# Altium PCB PCB.PcbDoc
Units mm, origin at the board's own origin, x right, y up, seen from the top; angles counter-clockwise.
Board outline 49.04 x 15.89 mm, 2 copper layers (Top Layer, Bottom Layer); 22 components, 11 nets, 52 pads, 10 vias.
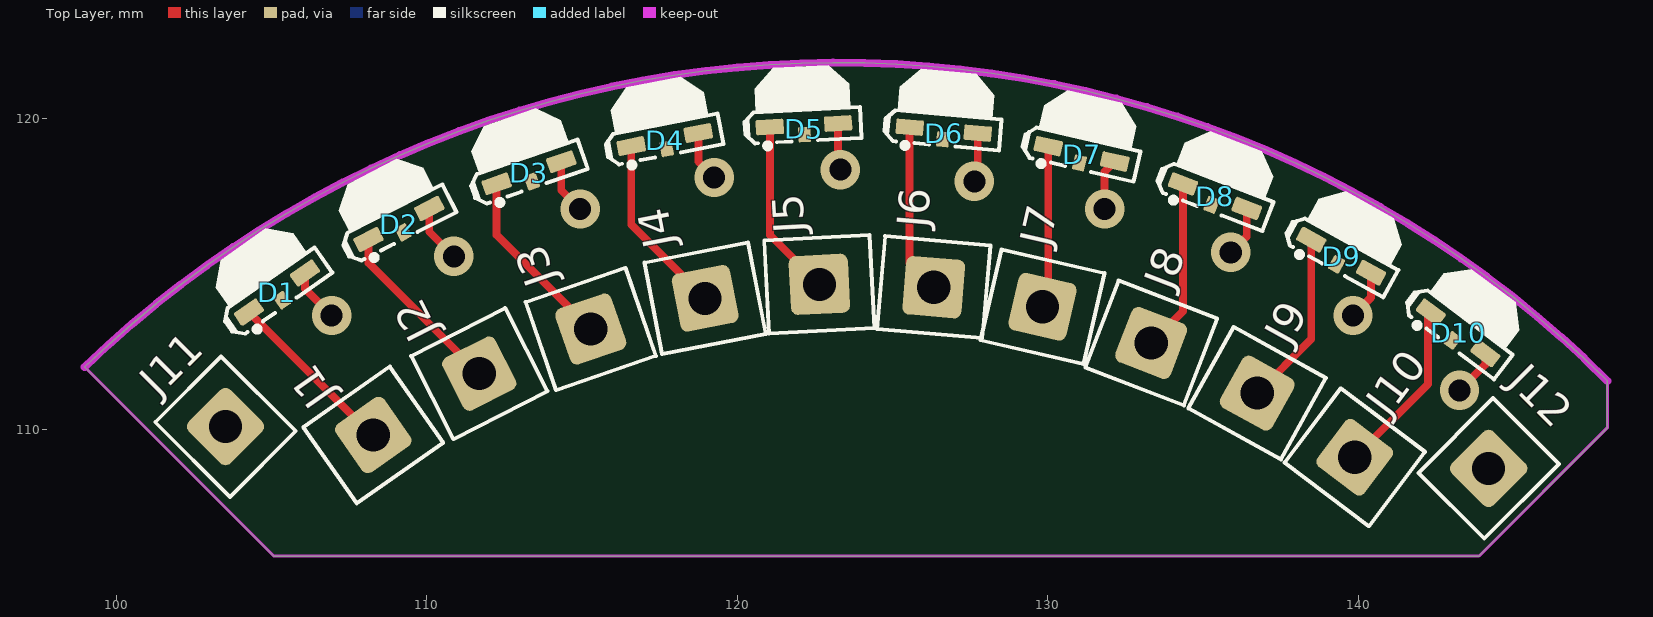
[diagram p0: Top Layer view]
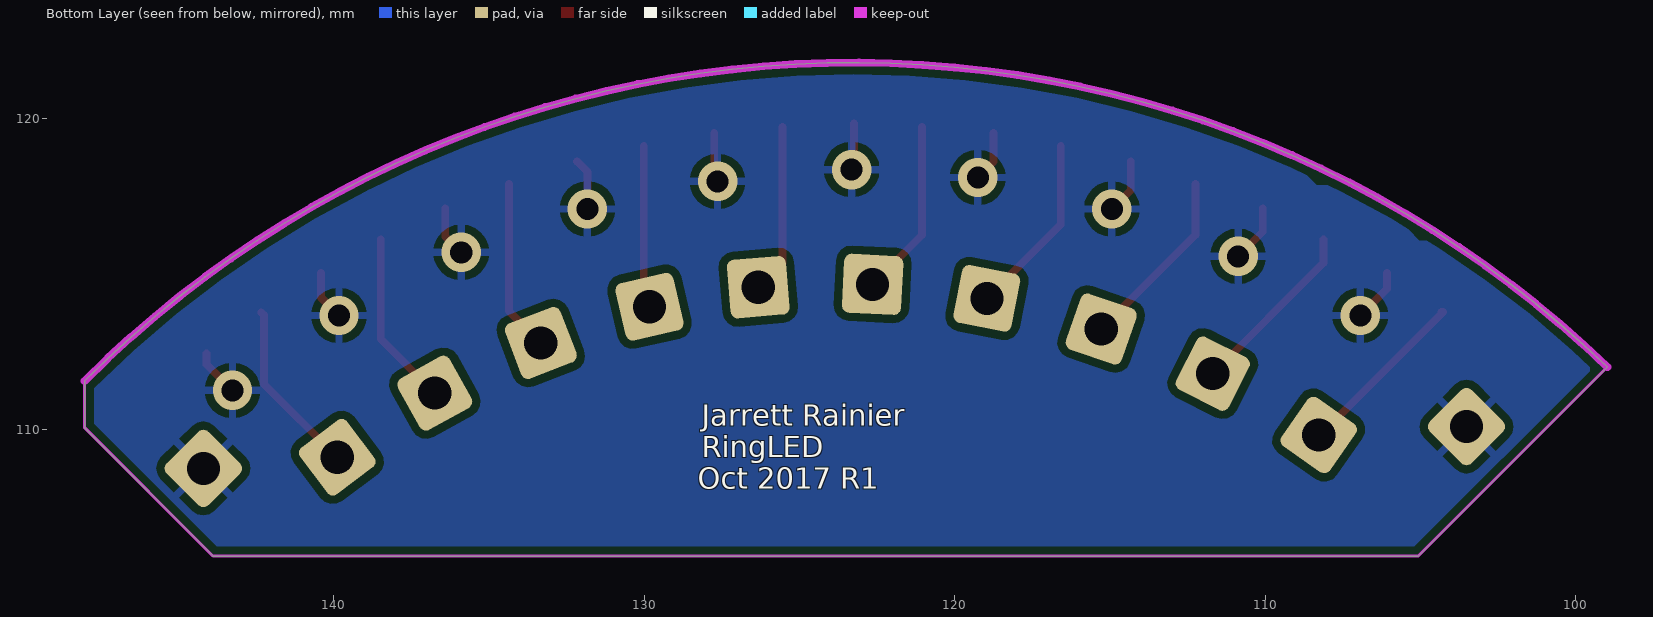
[diagram p1: Bottom Layer view, seen from below]
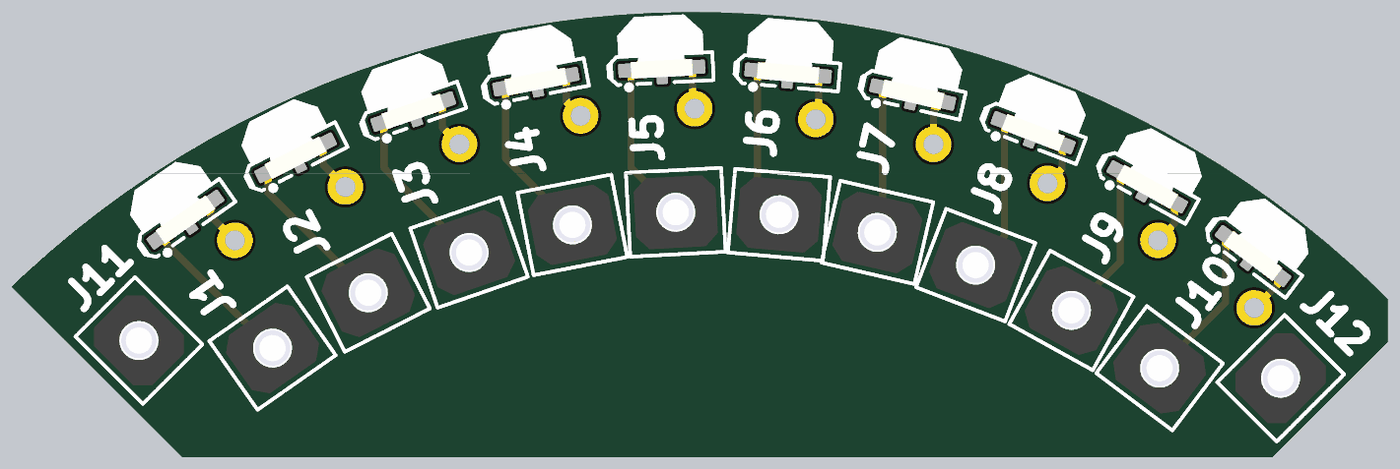
[diagram p2: 3D render of the assembled board from above, using the file's embedded part models]

## Layer stack, top to bottom
Top Layer: signal copper 0.0356
Dielectric: dielectric 0.32, FR-4, Dk 4.8
Bottom Layer: signal copper 0.0356

## Board outline
105.063,105.918 98.977,112.005 cw(c123.271,86.81) 148.02,111.558 148.02,110.049 143.888,105.918

## Design rules (kind name [scope] priority, off if disabled: settings)
Clearance [All] p1: gap=0.254
PolygonConnect [All] p1: connectstyle=Relief reliefconductorwidth=0.254 reliefentries=4 polygonreliefangle="90 Angle"
RoutingVias [All] p1: holewidth=0.711 width=1.27 viastyle="Through Hole" minholewidth=0.711 minwidth=1.27 maxholewidth=0.711 maxwidth=1.27
SilkscreenOverComponentPads [All] p1: minsilkscreentomaskgap=0.254
SolderMaskExpansion [All] p1: expansion=0.102
Width [All] p1: maxlimit=0.254 minlimit=0.254 preferedwidth=0.254
27 further rules are at their usual default settings.

## Components (designator, comment, footprint, x,y, rotation, side; value= is the part's Value field where it differs from the comment)
D1 "Blue" LED-0805S-SIDELED-2.1X0.6X1.0 105.172,114.404 r35 top
D2 "Blue" LED-0805S-SIDELED-2.1X0.6X1.0 109.098,116.611 r27 top
D3 "Blue" LED-0805S-SIDELED-2.1X0.6X1.0 113.288,118.263 r19 top
D4 "Blue" LED-0805S-SIDELED-2.1X0.6X1.0 117.663,119.329 r11 top
D5 "Blue" LED-0805S-SIDELED-2.1X0.6X1.0 122.144,119.79 r3 top
D6 "Blue" LED-0805S-SIDELED-2.1X0.6X1.0 126.645,119.636 r355 top
D7 "Blue" LED-0805S-SIDELED-2.1X0.6X1.0 131.084,118.871 r347 top
D8 "Blue" LED-0805S-SIDELED-2.1X0.6X1.0 135.377,117.509 r339 top
D9 "Blue" LED-0805S-SIDELED-2.1X0.6X1.0 139.444,115.574 r331 top
D10 "Blue" LED-0805S-SIDELED-2.1X0.6X1.0 143.21,113.105 r323 top
J1 "CONN_SOCKET_1x1P_0.100in" 1x1POS_SOCKET_LOWPROF 108.274,109.817 r35 top
J2 "CONN_SOCKET_1x1P_0.100in" 1x1POS_SOCKET_LOWPROF 111.686,111.792 r27 top
J3 "CONN_SOCKET_1x1P_0.100in" 1x1POS_SOCKET_LOWPROF 115.278,113.229 r19 top
J4 "CONN_SOCKET_1x1P_0.100in" 1x1POS_SOCKET_LOWPROF 118.96,114.217 r11 top
J5 "CONN_SOCKET_1x1P_0.100in" 1x1POS_SOCKET_LOWPROF 122.642,114.666 r3 top
J6 "CONN_SOCKET_1x1P_0.100in" 1x1POS_SOCKET_LOWPROF 126.324,114.576 r355 top
J7 "CONN_SOCKET_1x1P_0.100in" 1x1POS_SOCKET_LOWPROF 129.826,113.948 r347 top
J8 "CONN_SOCKET_1x1P_0.100in" 1x1POS_SOCKET_LOWPROF 133.329,112.78 r339 top
J9 "CONN_SOCKET_1x1P_0.100in" 1x1POS_SOCKET_LOWPROF 136.741,111.164 r331 top
J10 "CONN_SOCKET_1x1P_0.100in" 1x1POS_SOCKET_LOWPROF 139.884,109.098 r323 top
J11 "CONN_SOCKET_1x1P_0.100in" 1x1POS_SOCKET_LOWPROF 103.514,110.086 r135 top
J12 "CONN_SOCKET_1x1P_0.100in" 1x1POS_SOCKET_LOWPROF 144.195,108.739 r45 top

## Footprints (in the part's own frame and the unit in brackets; to place one, negate y for a bottom-side part, rotate by r counter-clockwise, add the part's x,y. Pads: shape width x height; smd on the part's side, far side on the other; paste and mask are expansions set on the pad)
1x1POS_SOCKET_LOWPROF [mil] "Connector Socket, Single-row 1-position, 0.100\" pitch"
  rrect25% 75x75 hole 42: 1(0,0)
  silkscreen extent -67,-59 67,59, body extent -57,-50 57,50, height 165
LED-0805S-SIDELED-2.1X0.6X1.0 [mm] "Lite-On Inc PLCC Side LED"
  round 0.508 on Mech15: 0(0,0)
  rrect25% 0.9x0.5 smd: A(1.1,0) K(-1.1,0)
  rrect25% 0.4x0.5 smd: B(0,-0.3)
  Top Layer pour cut-out: -0.508,0.3 0.508,0.3 0.508,-0.3 -0.508,-0.3
  silkscreen extent -1.9,-0.68 1.83,1.9, body extent -1.1,-0.3 1.1,0.8, height 0.7

## Part data
D1 D2 D3 D4 D5 D6 D7 D8 D9 D10: library part LED_SMD_PureGreen_0805RA_250mcd, "LED 0805 SIDELED SMD Green 250mcd 525nm"
J1 J2 J3 J4 J5 J6 J7 J8 J9 J10 J11 J12: "Socket header THT 1-Pos Low profile Single-row 2.54mm pitch"

## Via types
v1: diameter 1.27, hole 0.711, Top Layer to Bottom Layer, 10 vias

## Nets (pads, with @x,y where several pads share a name; then routed paths per layer and width w, separated by ;. In a path a pad name is that pad's centre, name@x,y a point inside that pad or via, vN(x,y) a via of type N, cw(c..) or ccw(c..) an arc to the next point about the centre after c; other vN are vias at no path point)
NetD1_K: D1.K J1.1 | length 5.6
  Top Layer w0.254: D1.K@104.318,113.773 D1.K J1.1@108.227,109.817
NetD2_K: D2.K J2.1 | length 5.8
  Top Layer w0.254: D2.K 108.117,115.361 J2.1
NetD3_K: D3.K J3.1 | length 5.9
  Top Layer w0.254: D3.K 112.248,116.26 J3.1
NetD4_K: D4.K J4.1 | length 5.9
  Top Layer w0.254: D4.K 116.584,116.594 J4.1
NetD5_K: D5.K J5.1 | length 5.7
  Top Layer w0.254: D5.K 121.045,116.263 J5.1
NetD6_K: D6.K J6.1 | length 5.5
  Top Layer w0.254: D6.K 125.549,115.351 J6.1
NetD7_K: D7.K J7.1 | length 5.2
  Top Layer w0.254: J7.1 130.012,114.134 D7.K
NetD8_K: D8.K J8.1 | length 5.5
  Top Layer w0.254: J8.1 134.35,113.802 D8.K
NetD9_K: D9.K J9.1 | length 5.7
  Top Layer w0.254: J9.1 138.482,112.905 D9.K
NetD10_K: D10.K J10.1 | length 5.7
  Top Layer w0.254: J10.1 142.24,111.454 142.24,113.675 D10.K
VCC: D1.A D2.A D3.A D4.A D5.A D6.A D7.A D8.A D9.A D10.A J11.1 J12.1 | length 16.6
  Top Layer w0.254: D1.A 106.073,114.526 v1(106.934,113.665) ; D2.A 110.078,116.363 v1(110.871,115.57) ; D3.A 114.328,117.701 v1(114.935,117.094) ; D4.A 118.743,118.62 v1(119.253,118.11) ; D5.A 123.242,118.439 v1(123.317,118.364) ; v1(127.635,117.983) 127.741,118.089 D6.A ; v1(131.826,117.094) 131.826,118.294 D7.A ; v1(135.89,115.697) 136.404,116.211 D8.A ; v1(139.827,113.665) 140.407,114.245 D9.A ; v1(143.256,111.252) 144.089,112.085 D10.A
pads on no net: D1.0 D1.B D2.0 D2.B D3.0 D3.B D4.0 D4.B D5.0 D5.B D6.0 D6.B D7.0 D7.B D8.0 D8.B D9.0 D9.B D10.0 D10.B

## Polygon pours and split planes (outlines as drawn)
VCC on Bottom Layer "Bottom Layer-No Net" (solid, remove dead copper, pour order 2): 99.061,111.918 107.627,103.351 107.823,103.351 141.321,103.351 148.02,110.049 148.02,111.558 146.685,112.893 146.685,112.903 146.304,112.903 145.034,114.173 144.145,115.062 144.018,115.062 143.51,115.062 142.113,116.459 141.986,116.586 141.605,116.586 141.224,116.586 140.716,117.094 140.081,117.729 139.7,117.729 138.811,117.729 138.303,118.237 137.795,118.745 137.414,118.745 136.779,118.745 136.525,118.999 135.89,119.634 134.747,119.634 134.493,119.634 133.985,120.142 133.604,120.523 132.461,120.523 131.572,120.523 131.445,120.65 131.064,121.031 130.302,121.031 129.286,121.031 129.032,121.285 128.778,121.539 128.016,121.539 126.619,121.539 126.365,121.793 124.333,121.793 123.19,121.793 123.063,121.666 120.904,121.666 119.253,121.666 119.126,121.539 118.999,121.412 117.856,121.412 116.586,121.412 116.205,121.031 115.824,120.65 114.3,120.65 113.284,120.65 112.776,120.142 112.268,119.634 110.998,119.634 110.109,119.634 109.347,118.872 108.331,117.856 107.315,117.856 106.807,117.856 105.918,116.967 105.029,116.078 104.267,116.078 103.378,116.078 101.6,114.3 99.218,111.918 99.061,111.918

## Keep-outs
Keep-Out Layer:
  the board outline again, w0.254

## Silkscreen, mask and mechanical layers (free items; w line width, h text height)
Bottom Overlay:
  text "Jarrett Rainier" at 128.143,110.109 h0.69
  text "RingLED" at 128.143,109.093 h0.69
  text "Oct 2017 R1" at 128.27,108.077 h0.69